# EAGLE board ImageProc_2.5 (EAGLE 6.0)
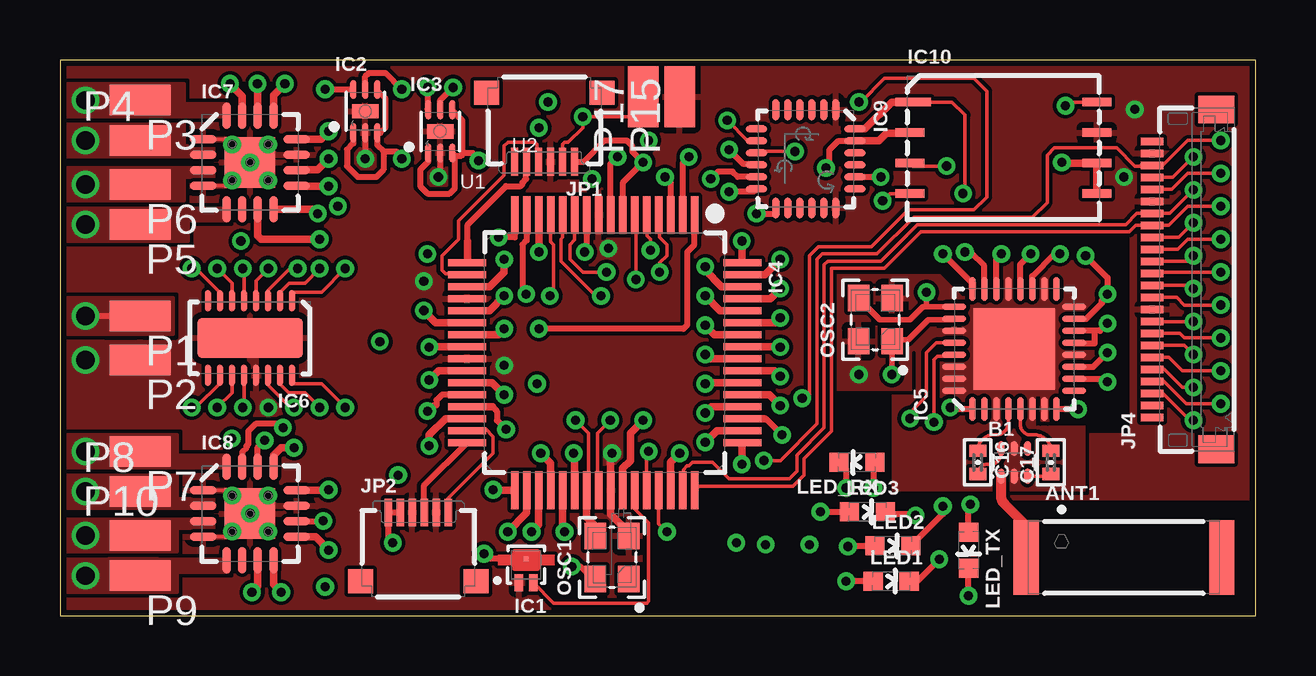
[diagram p0: board, top side]
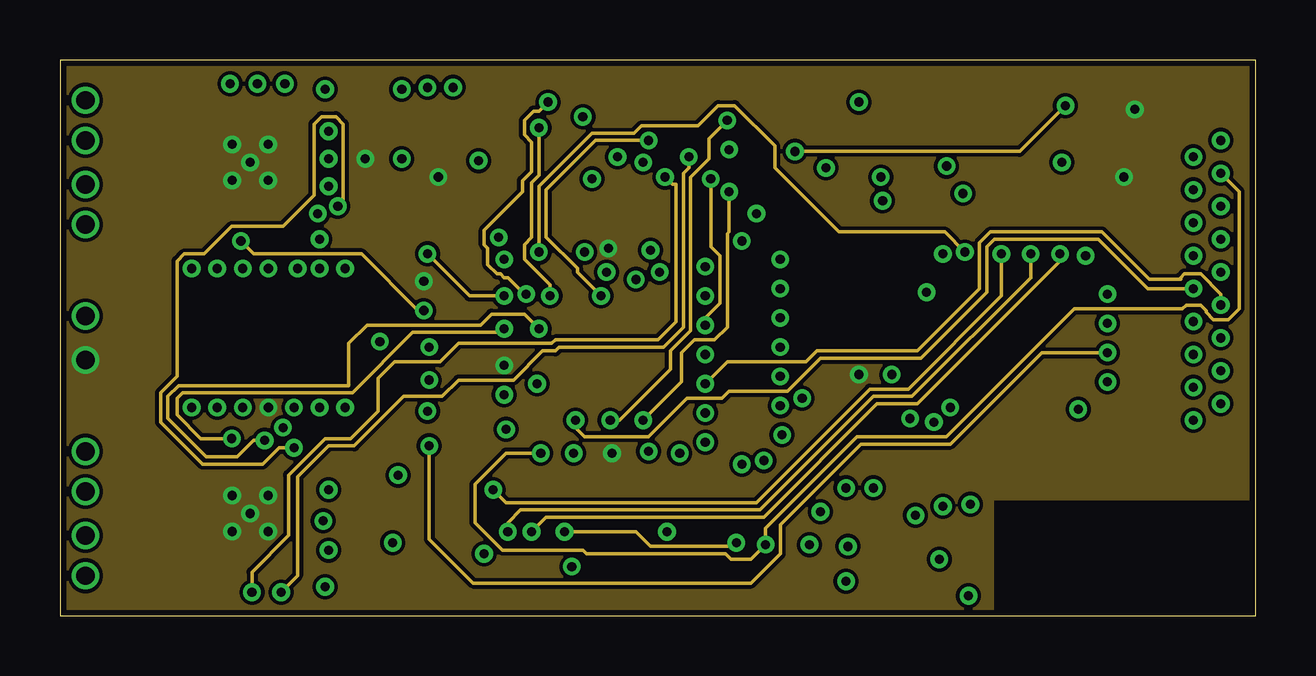
[diagram p1: board, inner layer Ground]
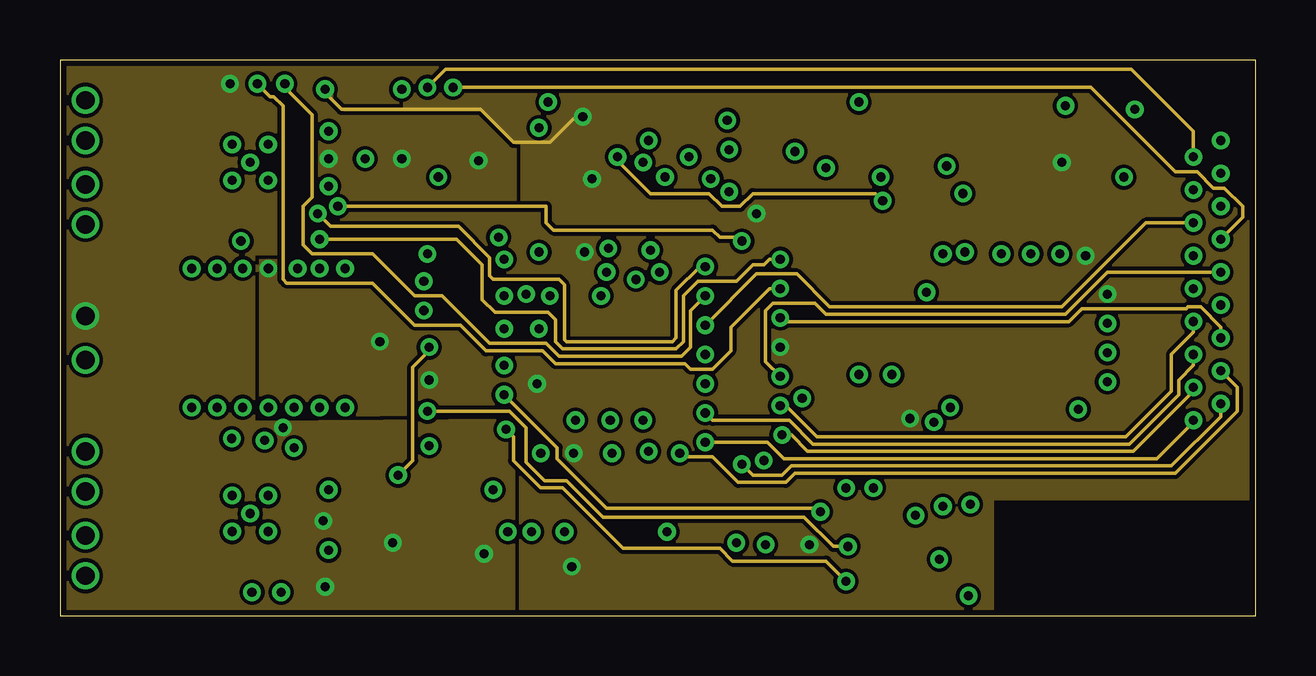
[diagram p2: board, inner layer Power]
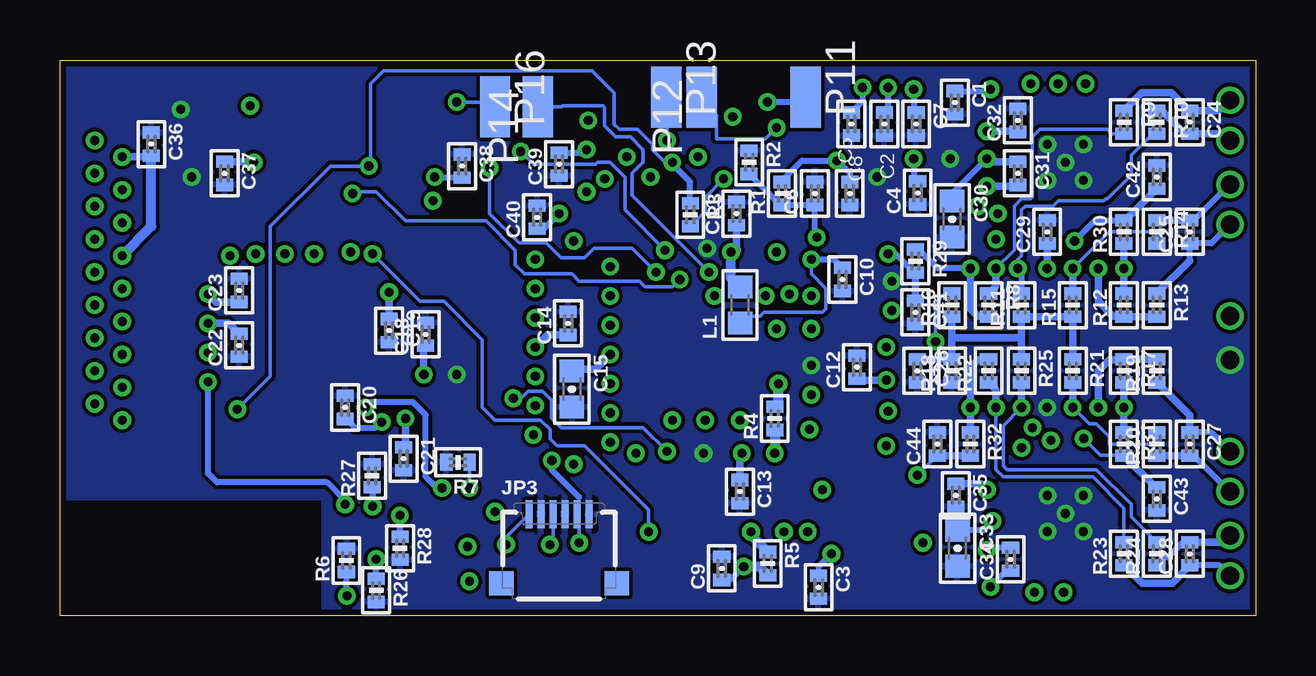
[diagram p3: board, bottom side, seen from below]

Size 49.83 x 23.16 mm. Coordinates in mm from the lower left corner, seen from the top.
Outline: 0,0 49.84,0 49.84,23.16 0,23.16 0,0
Copper layers (1*2+3*16): Top 0.035559375mm / dielectric 9mil / Ground 0.035559375mm / dielectric 40mil / Power 0.035559375mm / dielectric 9mil / Bottom 0.035559375mm
Design rules: minimum track width 6mil, minimum drill 15mil, track to track 6mil, track to pad 6mil, pad to pad 6mil, via to via 6mil, smd to smd 6mil, copper to edge 10mil, drill to drill 7mil, minimum pad ring 7mil, minimum via ring 7mil, stop-mask expansion 3mil, vias tented up to drill 0mil, thermal gap 10mil
tKeepout: 8 lines
bKeepout: 8 lines
tRestrict: 17 lines

## Footprints (pad centres in the part's own frame; a part is rotated, then mirrored left to right if it is on the bottom)
ANT8030-2R4-01A = smd 1.05 x 3.1: A -4.075,0; B 4.075,0
0603-BALUN = smd 0.3 x 0.65: 1 -0.55,-0.575; 2 0,-0.575; 3 0.55,-0.575; 4 -0.55,0.575; 5 0,0.575; 6 0.55,0.575
0402-CAP = smd 0.508 x 0.711: 1 -0.483,0; 2 0.483,0
0603-CAP = smd 0.94 x 1.016: 1 -0.749,0; 2 0.749,0
USP-3 = smd 0.35 x 0.7: 1 0.3,0.75; 2 -0.3,0.75 | smd 0.2 x 0.2: 3 0,-0.25
MLF-6 = smd 0.25 x 0.8: 1 -0.5,-0.9; 2 0,-0.9; 3 0.5,-0.9; 4 0.5,0.9; 5 0,0.9; 6 -0.5,0.9 | smd 1.1 x 0.6: EPAD 0,0
TQFP-64 = smd 1.575 x 0.3: 1 -5.737,3.75; 2 -5.737,3.25; 3 -5.737,2.75; 4 -5.737,2.25; 5 -5.737,1.75; 6 -5.737,1.25; 7 -5.737,0.75; 8 -5.737,0.25; 9 -5.737,-0.25; 10 -5.737,-0.75; 11 -5.737,-1.25; 12 -5.737,-1.75; 13 -5.737,-2.25; 14 -5.737,-2.75; 15 -5.737,-3.25; 16 -5.737,-3.75; 33 5.737,-3.75; 34 5.737,-3.25; 35 5.737,-2.75; 36 5.737,-2.25; 37 5.737,-1.75; 38 5.737,-1.25; 39 5.737,-0.75; 40 5.737,-0.25; 41 5.737,0.25; 42 5.737,0.75; 43 5.737,1.25; 44 5.737,1.75; 45 5.737,2.25; 46 5.737,2.75; 47 5.737,3.25; 48 5.737,3.75 | smd 0.3 x 1.575: 17 -3.75,-5.737; 18 -3.25,-5.737; 19 -2.75,-5.737; 20 -2.25,-5.737; 21 -1.75,-5.737; 22 -1.25,-5.737; 23 -0.75,-5.737; 24 -0.25,-5.737; 25 0.25,-5.737; 26 0.75,-5.737; 27 1.25,-5.737; 28 1.75,-5.737; 29 2.25,-5.737; 30 2.75,-5.737; 31 3.25,-5.737; 32 3.75,-5.737; 49 3.75,5.737; 50 3.25,5.737; 51 2.75,5.737; 52 2.25,5.737; 53 1.75,5.737; 54 1.25,5.737; 55 0.75,5.737; 56 0.25,5.737; 57 -0.25,5.737; 58 -0.75,5.737; 59 -1.25,5.737; 60 -1.75,5.737; 61 -2.25,5.737; 62 -2.75,5.737; 63 -3.25,5.737; 64 -3.75,5.737
VQFN-32QN2 = smd 1 x 0.28: 1 -2.5,1.75; 2 -2.5,1.25; 3 -2.5,0.75; 4 -2.5,0.25; 5 -2.5,-0.25; 6 -2.5,-0.75; 7 -2.5,-1.25; 8 -2.5,-1.75; 17 2.5,-1.75; 18 2.5,-1.25; 19 2.5,-0.75; 20 2.5,-0.25; 21 2.5,0.25; 22 2.5,0.75; 23 2.5,1.25; 24 2.5,1.75 | smd 0.28 x 1: 9 -1.75,-2.5; 10 -1.25,-2.5; 11 -0.75,-2.5; 12 -0.25,-2.5; 13 0.25,-2.5; 14 0.75,-2.5; 15 1.25,-2.5; 16 1.75,-2.5; 25 1.75,2.5; 26 1.25,2.5; 27 0.75,2.5; 28 0.25,2.5; 29 -0.25,2.5; 30 -0.75,2.5; 31 -1.25,2.5; 32 -1.75,2.5 | smd 3.4 x 3.4: PAD 0,0
DFN-16 = smd 0.25 x 0.9: 1 -1.75,-1.55; 2 -1.25,-1.55; 3 -0.75,-1.55; 4 -0.25,-1.55; 5 0.25,-1.55; 6 0.75,-1.55; 7 1.25,-1.55; 8 1.75,-1.55; 9 1.75,1.55; 10 1.25,1.55; 11 0.75,1.55; 12 0.25,1.55; 13 -0.25,1.55; 14 -0.75,1.55; 15 -1.25,1.55; 16 -1.75,1.55 | smd 4.4 x 1.65: PAD 0,0
S-PWQFN-N16 = smd 1.1 x 0.35: 1 -1.95,0.975; 2 -1.95,0.325; 3 -1.95,-0.325; 4 -1.95,-0.975; 9 1.95,-0.975; 10 1.95,-0.325; 11 1.95,0.325; 12 1.95,0.975 | smd 0.35 x 1.1: 5 -0.975,-1.95; 6 -0.325,-1.95; 7 0.325,-1.95; 8 0.975,-1.95; 13 0.975,1.95; 14 0.325,1.95; 15 -0.325,1.95; 16 -0.975,1.95 | smd 2.1 x 2.1: PPAD 0,0
QFN-24 = smd 0.9 x 0.3: 1 -2.05,1.25; 2 -2.05,0.75; 3 -2.05,0.25; 4 -2.05,-0.25; 5 -2.05,-0.75; 6 -2.05,-1.25; 13 2.05,-1.25; 14 2.05,-0.75; 15 2.05,-0.25; 16 2.05,0.25; 17 2.05,0.75; 18 2.05,1.25 | smd 0.3 x 0.9: 7 -1.25,-2.05; 8 -0.75,-2.05; 9 -0.25,-2.05; 10 0.25,-2.05; 11 0.75,-2.05; 12 1.25,-2.05; 19 1.25,2.05; 20 0.75,2.05; 21 0.25,2.05; 22 -0.25,2.05; 23 -0.75,2.05; 24 -1.25,2.05
CASON-8 = smd 1.473 x 0.369: 1 -3.764,1.905 | smd 1.203 x 0.369: 2 -3.898,0.635; 3 -3.898,-0.635; 4 -3.898,-1.905; 5 3.898,-1.905; 6 3.898,-0.635; 7 3.898,0.635; 8 3.898,1.905
MOLEX_503480-0600 = smd 0.3 x 1.15: 1 -1.25,1.725; 2 -0.75,1.725; 3 -0.25,1.725; 4 0.25,1.725; 5 0.75,1.725; 6 1.25,1.725 | smd 1.035 x 1: L -2.408,-1.15; R 2.408,-1.15
MOLEX_52740-2490 = smd 0.3 x 0.95: 1 -5.75,1.875; 2 -5.25,1.875; 3 -4.75,1.875; 4 -4.25,1.875; 5 -3.75,1.875; 6 -3.25,1.875; 7 -2.75,1.875; 8 -2.25,1.875; 9 -1.75,1.875; 10 -1.25,1.875; 11 -0.75,1.875; 12 -0.25,1.875; 13 0.25,1.875; 14 0.75,1.875; 15 1.25,1.875; 16 1.75,1.875; 17 2.25,1.875; 18 2.75,1.875; 19 3.25,1.875; 20 3.75,1.875; 21 4.25,1.875; 22 4.75,1.875; 23 5.25,1.875; 24 5.75,1.875 | smd 1.15 x 1.5: L -7.075,-0.8; R 7.075,-0.8
0603 = smd 0.94 x 1.016: 1 -0.749,0; 2 0.749,0
LED-0603 = smd 0.8 x 0.8: A 0,-0.75; C 0,0.75
OSCILLATOR-SMD = smd 1.1 x 0.9: 1 -0.9,-0.7; 2 0.9,-0.7; 3 0.9,0.7; 4 -0.9,0.7
CRYSTAL-SMD = smd 1.1 x 0.9: 1 -0.9,-0.7; 2 0.9,-0.7; 3 0.9,0.7; 4 -0.9,0.7
SMD1,27-2,54 = smd 1.27 x 2.54: 1 0,0
0402-RES = smd 0.508 x 0.711: 1 -0.483,0; 2 0.483,0

## Placement (x,y rotation side)
ANT1  ANT8030-2R4-01A  [ANT8030-2R4-01A]  44.35,2.44 0 top
B1  HHM1710D1  [0603-BALUN]  39.78,6.4 0 top
C1  1uF  [0402-CAP]  12.53,21.39 270 bottom
C2  1uF  [0402-CAP]  15.47,20.5 270 bottom
C3  0.1uF  [0402-CAP]  18.21,1.19 270 bottom
C4  1uF  [0402-CAP]  14.08,17.63 90 bottom
C5  1uF  [0402-CAP]  16.92,17.6 90 bottom
C6  0.1uF  [0402-CAP]  18.36,17.6 90 bottom
C7  1uF  [0402-CAP]  14.15,20.5 270 bottom
C8  1uF  [0402-CAP]  16.84,20.5 270 bottom
C9  0.1uF  [0402-CAP]  22.25,1.98 90 bottom
C10  0.1uF  [0402-CAP]  17.22,14.02 270 bottom
C11  0.1uF  [0402-CAP]  21.64,16.76 90 bottom
C12  0.1uF  [0402-CAP]  16.61,10.36 90 bottom
C13  0.1uF  [0402-CAP]  21.49,5.18 270 bottom
C14  0.1uF  [0402-CAP]  28.65,12.19 90 bottom
C15  4.7uF  [0603-CAP]  28.5,9.45 270 bottom
C16  22pF  [0402-CAP]  38.25,6.4 270 top
C17  22pF  [0402-CAP]  41.3,6.4 90 top
C18  10pF  [0402-CAP]  34.59,11.73 90 bottom
C19  10pF  [0402-CAP]  36.12,11.89 270 bottom
C20  0.1uF  [0402-CAP]  37.95,8.69 270 bottom
C21  1uF  [0402-CAP]  35.51,6.55 270 bottom
C22  0.1uF  [0402-CAP]  42.37,11.28 90 bottom
C23  1uF  [0402-CAP]  42.37,13.56 90 bottom
C24  0.1uF  [0402-CAP]  2.74,20.57 270 bottom
C25  0.1uF  [0402-CAP]  2.74,16 90 bottom
C26  0.1uF  [0402-CAP]  14.1,10.21 270 bottom
C27  0.1uF  [0402-CAP]  2.74,7.16 270 bottom
C28  0.1uF  [0402-CAP]  2.74,2.59 90 bottom
C29  0.1uF  [0402-CAP]  8.69,16 90 bottom
C30  22uF  [0603-CAP]  12.65,16.54 270 bottom
C31  10nF  [0402-CAP]  9.91,18.44 270 bottom
C32  2.2uF  [0402-CAP]  9.91,20.65 90 bottom
C33  22uF  [0603-CAP]  12.42,2.82 270 bottom
C34  10nF  [0402-CAP]  10.21,2.36 90 bottom
C35  2.2uF  [0402-CAP]  12.5,5.03 270 bottom
C36  0.1uF  [0402-CAP]  46.02,19.66 270 bottom
C37  0.1uF  [0402-CAP]  42.98,18.44 270 bottom
C38  2.2nF  [0402-CAP]  33.07,18.75 270 bottom
C39  0.1uF  [0402-CAP]  29.03,18.82 90 bottom
C40  0.1uF  [0402-CAP]  29.95,16.61 90 bottom
C41  2.2nF  [0402-CAP]  14.17,12.65 270 bottom
C42  2.2nF  [0402-CAP]  4.11,18.29 90 bottom
C43  2.2nF  [0402-CAP]  4.11,4.88 270 bottom
C44  2.2nF  [0402-CAP]  13.26,7.16 90 bottom
IC1  XC61GC3002HR-G  [USP-3]  19.43,2.13 180 top
IC2  MIC5335-SPYMT  [MLF-6]  12.73,21.03 0 top
IC3  MIC5335-JGYMT  [MLF-6]  15.85,20.19 0 top
IC4  DSPIC33FJ128MC706A  [TQFP-64]  22.71,10.97 270 top
IC5  AT86RF233-ZU  [VQFN-32QN2]  39.78,11.13 90 top
IC6  LTC6088  [DFN-16]  7.92,11.58 180 top
IC7  DRV8833RTY  [S-PWQFN-N16]  7.92,18.9 0 top
IC8  DRV8833RTY  [S-PWQFN-N16]  7.92,4.27 0 top
IC9  MPU-6000  [QFN-24]  31.09,19.05 270 top
IC10  AT45DB642D-CNU  [CASON-8]  39.32,19.51 0 top
JP1  MOLEX_503480-0600  [MOLEX_503480-0600]  20.19,20.65 180 top
JP2  MOLEX_503480-0600  [MOLEX_503480-0600]  14.94,2.59 0 top
JP3  MOLEX_503480-0600  [MOLEX_503480-0600]  29.03,2.51 0 bottom
JP4  51441-2493-C  [MOLEX_52740-2490]  47.4,14.02 90 top
L1  4.7uH  [0603]  21.49,12.95 90 bottom
LED1  YELLOW  [LED-0603]  34.65,1.45 270 top
LED2  GREEN  [LED-0603]  34.72,2.92 270 top
LED3  RED  [LED-0603]  33.66,4.34 270 top
LED_RX  GREEN  [LED-0603]  33.22,6.4 90 top
LED_TX  RED  [LED-0603]  37.87,2.74 180 top
OSC1  ECS-2033-400  [OSCILLATOR-SMD]  23.01,2.44 90 top
OSC2  NX2520SA-16.000000MHZ  [CRYSTAL-SMD]  33.99,12.34 90 top
P1  BAT+  [SMD1,27-2,54]  3.35,12.5 90 top
P2  BAT-  [SMD1,27-2,54]  3.35,10.67 90 top
P3  MA1  [SMD1,27-2,54]  3.35,21.49 90 top
P4  MA2  [SMD1,27-2,54]  3.35,19.81 270 top
P5  MB1  [SMD1,27-2,54]  3.35,16.31 90 top
P6  MB2  [SMD1,27-2,54]  3.35,17.98 90 top
P7  MC1  [SMD1,27-2,54]  3.35,6.86 90 top
P8  MC2  [SMD1,27-2,54]  3.35,5.18 270 top
P9  MD1  [SMD1,27-2,54]  3.35,1.68 90 top
P10  MD2  [SMD1,27-2,54]  3.35,3.35 270 top
P11  EXT1  [SMD1,27-2,54]  18.75,21.62 180 bottom
P12  EXT2  [SMD1,27-2,54]  23.09,21.62 0 bottom
P13  EXT3  [SMD1,27-2,54]  24.56,21.62 180 bottom
P14  EXT4  [SMD1,27-2,54]  29.92,21.21 0 bottom
P15  EXT5  [SMD1,27-2,54]  25.83,21.64 0 top
P16  EXT5  [SMD1,27-2,54]  31.7,21.21 180 bottom
P17  EXT5  [SMD1,27-2,54]  24.31,21.64 0 top
R1  1k  [0402-RES]  19.74,17.6 90 bottom
R2  2.7k  [0402-RES]  21.11,18.9 270 bottom
R3  4.7k  [0402-RES]  23.56,16.72 270 bottom
R4  4.7k  [0402-RES]  20.04,8.23 90 bottom
R5  4.7k  [0402-RES]  20.33,2.18 270 bottom
R6  2.7k  [0402-RES]  37.9,2.31 90 bottom
R7  2.7k  [0402-RES]  33.25,6.4 180 bottom
R8  15k  [0402-RES]  11.13,12.95 270 bottom
R9  47k  [0402-RES]  5.49,20.57 270 bottom
R10  47k  [0402-RES]  4.11,20.57 270 bottom
R11  15k  [0402-RES]  9.75,12.95 90 bottom
R12  15k  [0402-RES]  5.49,12.95 90 bottom
R13  47k  [0402-RES]  4.11,12.95 270 bottom
R14  47k  [0402-RES]  4.11,16 270 bottom
R15  15k  [0402-RES]  7.62,12.95 90 bottom
R16  4.7k  [0402-RES]  12.65,12.95 90 bottom
R17  15k  [0402-RES]  5.49,10.21 270 bottom
R18  4.7k  [0402-RES]  12.65,10.21 90 bottom
R19  47k  [0402-RES]  4.11,10.21 90 bottom
R20  47k  [0402-RES]  4.11,7.16 90 bottom
R21  15k  [0402-RES]  7.62,10.21 270 bottom
R22  15k  [0402-RES]  11.13,10.21 90 bottom
R23  47k  [0402-RES]  5.49,2.59 90 bottom
R24  47k  [0402-RES]  4.11,2.59 90 bottom
R25  15k  [0402-RES]  9.75,10.21 270 bottom
R26  2.7k  [0402-RES]  36.65,1.07 270 bottom
R27  2.7k  [0402-RES]  36.83,5.84 90 bottom
R28  2.7k  [0402-RES]  35.66,2.82 270 bottom
R29  1k  [0402-RES]  14.17,14.78 270 bottom
R30  1k  [0402-RES]  5.49,16 90 bottom
R31  1k  [0402-RES]  5.49,7.16 270 bottom
R32  1k  [0402-RES]  11.89,7.16 270 bottom

## Library data of the parts
ANT1 B1 C1-C10 C26 C29 C36 C41 IC1-IC10 JP1-JP4 L1 LED1-LED3 LED_RX LED_TX OSC1 OSC2 R1-R3 R6 R7 R26-R29 = biomimetic
C11-C14 C30 C33 C40 C42-C44 R4 R5 R30-R32 = biomimetic; AUTHOR: Ryan Julian (ryanjulian@berkeley.edu); REVISION: 1; YEAR: 2012
C15 = biomimetic; COMMENT: ESR < 5 Ohm; TECHNOLOGY: CERAMIC; VOLTAGE: 16V
C16 C17 = biomimetic; DIELECTRIC: C0G; TECHNOLOGY: CERAMIC; TOLERANCE: 5%; VOLTAGE: 50V
C18 C19 = biomimetic; AUTHOR: Ryan Julian (ryanjulian@berkeley.edu); DIELECTRIC: C0G; REVISION: 1; TECHNOLOGY: CERAMIC; TOLERANCE: 10%; VOLTAGE: 50V; YEAR: 2012
C20 C22 = biomimetic; AUTHOR: Ryan Julian (ryanjulian@berkeley.edu); DIELECTRIC: X7R; REVISION: 1; TECHNOLOGY: CERAMIC; TOLERANCE: 10%; VOLTAGE: 16V; YEAR: 2012
C21 C23 = biomimetic; AUTHOR: Ryan Julian (ryanjulian@berkeley.edu); DIELECTRIC: X5R; REVISION: 1; TECHNOLOGY: CERAMIC; TOLERANCE: 10%; VOLTAGE: 16V; YEAR: 2012
C24 C25 C27 C28 = biomimetic; AUTHOR: Ryan Julian (ryanjulian@berkeley.edu); REVISION: 1; TECHNOLOGY: CERAMIC; VOLTAGE: 10V; YEAR: 2012
C31 C34 = biomimetic; AUTHOR: Ryan Julian (ryanjulian@berkeley.edu); DIELECTRIC: X7R; REVISION: 1; TECHNOLOGY: CERAMIC; VOLTAGE: 16V; YEAR: 2012
C32 = biomimetic; AUTHOR: Ryan Julian (ryanjulian@berkeley.edu); REVISION: 1; TECHNOLOGY: CERAMIC; VOLTAGE: 6.3V; YEAR: 2012
C35 = biomimetic; TECHNOLOGY: CERAMIC; VOLTAGE: 6.3V
C37 = biomimetic; DIELECTRIC: X7R; TECHNOLOGY: CERAMIC; TOLERANCE: 10%; VOLTAGE: 4V
C38 = biomimetic; DIELECTRIC: X7R; TECHNOLOGY: CERAMIC; TOLERANCE: 10%; VOLTAGE: 50V
C39 = biomimetic; DIELECTRIC: X7R; TECHNOLOGY: CERAMIC; TOLERANCE: 10%; VOLTAGE: 2V
P1 P2 P4-P17 = wirepad; AUTHOR: Ryan Julian (ryanjulian@berkeley.edu); REVISION: 1; YEAR: 2012
P3 = wirepad
R8 = biomimetic; AUTHOR: Ryan Julian (ryanjulian@berkeley.edu); REVISION: 1; TOLERANCE: 1%; YEAR: 2012
R9-R25 = biomimetic; TOLERANCE: 1%

## Nets
1.8V: C8.1 IC3.5 JP4.15
2.5V: C2.1 C36.2 IC3.6 JP4.14 JP4.21
3.0V: C7.1 IC2.5
3.3V: C1.1 C9.1 C11.1 C12.1 C13.1 C14.1 C21.1 C23.1 C29.1 C37.1 C40.1 IC2.6 IC4.10 IC4.26 IC4.38 IC4.57 IC5.15 IC5.28 IC6.4 IC9.13 IC10.5 IC10.6 JP1.2 JP3.1 L1.2 OSC1.4 P17.1 R3.2 R4.2 R5.2 R16.2
40MHZ: IC4.39 JP4.12 OSC1.3
!RESET: IC4.7 IC5.8 IC10.3 JP1.1 R3.1
!SS1: IC4.14 IC5.23
!SS2_1: IC4.8 IC10.4
!SS2_2: IC4.40 IC9.8
AN1/RB1: IC4.15 P11.1
AN3/INDX/RB3: IC4.13 P12.1
AN4/QEA/IC7/RB4: IC4.12 P13.1
AN5/QEB/IC8/RB5: IC4.11 P14.1
BATT_LEVEL: C6.1 IC4.16 R1.1 R2.2
CAM_D0: IC4.46 JP4.6
CAM_D1: IC4.49 JP4.4
CAM_D2: IC4.50 JP4.3
CAM_D3: IC4.51 JP4.5
CAM_D4: IC4.52 JP4.7
CAM_D5: IC4.53 JP4.9
CAM_D6: IC4.54 JP4.11
CAM_D7: IC4.55 JP4.13
CAM_HREF: IC4.58 IC9.11 JP4.16
CAM_PCLK: IC4.59 JP4.8
CAM_PWDN: IC4.48 JP4.17
CAM_VSYNC: IC4.47 JP4.18
GN_LED: IC4.28 LED2.A
GND: B1.2 B1.5 C1.2 C2.2 C3.2 C4.1 C5.1 C6.2 C7.2 C8.2 C9.2 C10.2 C11.2 C12.2 C13.2 C14.2 C15.2 C18.2 C19.2 C20.1 C21.2 C22.1 C23.2 C26.2 C29.2 C30.2 C32.2 C33.2 C35.2 C36.1 C37.2 C38.1 C39.1 C40.2 C41.2 C42.2 C43.2 C44.2 IC1.1 IC2.2 IC2.EPAD IC3.2 IC3.EPAD IC4.9 IC4.20 IC4.25 IC4.41 IC5.3 IC5.6 IC5.7 IC5.12 IC5.16 IC5.18 IC5.21 IC5.27 IC5.30 IC5.31 IC5.32 IC5.PAD IC6.13 IC6.PAD IC7.1 IC7.4 IC7.11 IC7.PPAD IC8.1 IC8.4 IC8.11 IC8.PPAD IC9.1 IC9.18 IC10.7 JP1.3 JP2.3 JP2.5 JP3.2 JP3.4 JP3.6 JP4.10 JP4.19 JP4.23 OSC1.2 OSC2.2 OSC2.4 P2.1 P15.1 R2.1 R6.2 R7.2 R18.1 R26.2 R27.2 R28.2
IC3/INT3/RD10: IC4.44 P16.1
IMU_IRQ: IC4.42 IC9.12
LOWBATT_IRQ: IC1.2 IC4.43
MOTOR_A_BEMF: C41.1 IC4.21 R29.2
MOTOR_A_IN1: IC4.61 IC7.14
MOTOR_A_IN2: IC4.60 IC7.13
MOTOR_A_OUT1: C24.1 IC7.16 P3.1 R9.1
MOTOR_A_OUT2: C24.2 IC7.2 P4.1 R10.1
MOTOR_B_BEMF: C42.1 IC4.22 R30.2
MOTOR_B_IN1: IC4.63 IC7.7
MOTOR_B_IN2: IC4.62 IC7.8
MOTOR_B_OUT1: C25.1 IC7.5 P5.1 R13.1
MOTOR_B_OUT2: C25.2 IC7.3 P6.1 R14.1
MOTOR_C_BEMF: C43.1 IC4.23 R31.2
MOTOR_C_IN1: IC4.1 IC8.14
MOTOR_C_IN2: IC4.64 IC8.13
MOTOR_C_OUT1: C27.1 IC8.16 P7.1 R19.1
MOTOR_C_OUT2: C27.2 IC8.2 P8.1 R20.1
MOTOR_D_BEMF: C44.1 IC4.24 R32.2
MOTOR_D_IN1: IC4.3 IC8.7
MOTOR_D_IN2: IC4.2 IC8.8
MOTOR_D_OUT1: C28.1 IC8.5 P9.1 R23.1
MOTOR_D_OUT2: C28.2 IC8.3 P10.1 R24.1
N$1: C22.2 IC5.13 IC5.14
N$2: C31.2 IC7.9
N$3: C20.2 IC5.29
N$4: ANT1.A B1.1
N$5: LED_TX.C R6.1
N$6: C16.1 IC5.4
N$7: C17.2 IC5.5
N$8: C19.1 IC5.25 OSC2.3
N$9: C18.1 IC5.26 OSC2.1
N$10: B1.3 C17.1
N$11: LED_RX.C R7.1
N$12: B1.4 C16.2
N$13: IC5.1 LED_RX.A
N$14: IC5.10 LED_TX.A
N$15: LED1.C R26.1
N$16: LED2.C R27.1
N$17: LED3.C R28.1
N$18: C32.1 IC7.12
N$19: C34.2 IC8.9
N$20: C35.1 IC8.12
N$21: C10.1 IC4.19 L1.1
N$22: IC6.6 R12.1 R13.2
N$23: IC6.5 R14.2 R15.2
N$24: IC6.11 R17.1 R19.2
N$25: IC6.12 R20.2 R21.2
N$26: IC6.15 R22.1 R23.2
N$27: IC6.14 R24.2 R25.2
N$28: C15.1 IC4.56
N$29: C38.2 IC9.20
N$30: IC6.2 R8.1 R9.2
N$31: IC6.3 R10.2 R11.2
N$32: C39.2 IC9.10
N$34: IC6.16 R22.2 R32.1
N$35: IC6.10 R17.2 R31.1
N$36: IC6.1 R8.2 R29.1
N$37: IC6.7 R12.2 R30.1
PGC: IC4.17 JP1.5
PGD: IC4.18 JP1.4
RADIO_IRQ: IC4.45 IC5.24
RADIO_SLP_TR: IC4.30 IC5.11
RD_LED: IC4.27 LED3.A
SCK1: IC4.35 IC5.19
SCK2: IC4.4 IC9.23 IC10.2
SCL1: IC4.36 JP3.3 JP4.20 R4.1
SDA1: IC4.37 JP3.5 JP4.22 R5.1
SDI1: IC4.34 IC5.20
SDI2: IC4.5 IC9.9 IC10.8
SDO1: IC4.33 IC5.22
SDO2: IC4.6 IC9.24 IC10.1
U2RX: IC4.31 JP2.6
U2TX: IC4.32 JP2.4
V_BATT: C3.1 C4.2 C5.2 C30.1 C31.1 C33.1 C34.1 IC1.3 IC2.1 IC2.3 IC2.4 IC3.1 IC3.3 IC3.4 IC7.10 IC7.15 IC8.10 IC8.15 JP2.1 JP2.2 P1.1 R1.2
V_REF: C26.1 R11.1 R15.1 R16.1 R18.2 R21.1 R25.1
YW_LED: IC4.29 LED1.A

## Tracks (layer width: path | path; a pad name or v marks a point on that pad's centre or on a via)
1.8V  (via drill 0.38)
  Top 0.152: JP4.15 46.59,15.27 47.02,15.7 v48.39,15.7
  Top 0.254: IC3.5 15.85,21.49 v16.38,22.02
  Power 0.152: v16.38,22.02 42.98,22.02 46.48,18.52 47.4,18.52 48.08,17.83 48.54,17.83 49.3,17.07 49.3,16.61 v48.39,15.7
  Bottom 0.254: v16.38,22.02 16.38,21.44 C8.1
2.5V  (via drill 0.38)
  Top 0.152: JP4.21 46.39,18.27 v47.24,19.13 | JP4.14 47,14.77 v47.24,15.01
  Top 0.254: v15.32,22.02 15.32,21.13 IC3.6
  Power 0.152: v15.32,22.02 16.08,22.78 44.65,22.78 47.24,20.19 v47.24,19.13
  Bottom 0.254: v15.32,22.02 15.32,21.13 C2.1
  Bottom 0.305: C36.2 46.08,19.13 v47.24,19.13
  Bottom 0.406: v47.24,15.01 46.02,16.23 C36.2
3.0V  (via drill 0.38)
  Top 0.254: IC2.5 12.72,22.48 12.88,22.63 13.56,22.63 v14.25,21.95
  Bottom 0.254: v14.25,21.95 14.25,21.08 C7.1
3.3V  (via drill 0.38)
  Top 0.152: IC6.4 8.18,13.97 v8.69,14.48 | IC5.28 36.52,11.38 36.12,10.97 36.12,9.14 35.43,8.46 v35.43,8.23 | P17.1 24.31,21.49 24.23,21.49 24.23,20.8 v21.79,20.8 21.79,20.34 21.18,19.74 21.03,19.74 20.95,19.66 20.95,18.94 JP1.2
  Top 0.254: IC2.6 11.06,21.93 v11.05,21.95 | v29.03,16.76 29.84,16.76 IC9.13 | v21.34,2.06 21.69,2.06 C9.1 22.29,1.54 OSC1.4 | IC5.15 42.78,12.38 43.43,13.03 43.43,13.18 v43.66,13.41 43.66,14.1 v42.75,15.01 | IC4.10 21.96,15.33 21.87,15.24 v21.87,15.16
  Top 0.305: IC10.5 IC10.6 41.78,18.87 v41.76,18.9 | OSC1.4 22.3,1.52 | v15.39,9.83 15.79,10.22 IC4.26 | IC4.38 21.46,6.74 v21.41,6.78 | IC4.57 30,11.22 v30.02,11.2
  Power 0.152: v11.05,21.95 11.05,21.79 11.73,21.11 17.53,21.11 18.9,19.74 20.42,19.74 21.49,20.8 v21.79,20.8
  Bottom 0.152: v22.17,18.21 22.94,17.45 22.94,16.86 R3.2 | JP3.1 31.24,3.28 v31.24,2.97 | v13.34,11.43 13.34,13.03 12.93,13.44 R16.2
  Bottom 0.254: C1.1 11.12,21.87 v11.05,21.95 | C40.1 29.67,16.13 v29.03,16.76 | 22.23,1.52 21.87,1.52 v21.34,2.06
  Bottom 0.305: C37.1 41.78,18.92 v41.76,18.9 | C29.1 v8.69,14.48 | C9.1 22.23,1.52 | 21.64,15.24 C11.1 | C13.1 21.49,6.71 v21.41,6.78 | v15.39,9.83 16.56,9.83 C12.1 | C21.1 35.43,7.11 v35.43,8.23 | C14.1 29.52,11.71 v30.02,11.2 | C23.1 43.33,13.08 v43.66,13.41
  Bottom 0.406: R5.2 20.69,2.06 v21.34,2.06 | R4.2 19.89,8.87 v19.89,9.68 | L1.2 21.87,14.08 v21.87,15.16 21.72,15.16 21.64,15.24
  pour Power (rank 6): 0,23.16 53.8,23.16 53.8,4.88 38.86,4.88 38.86,0 0,0
40MHZ  (via drill 0.38)
  Top 0.152: JP4.12 47.11,13.77 v47.24,13.64 | v21.49,8.15 22.02,7.62 22.02,5.71 21.96,5.65 IC4.39
  Top 0.305: IC4.39 21.96,4.1 22.25,3.81 22.25,3.4 OSC1.3
  Ground 0.152: v47.24,13.64 45.34,13.64 43.28,15.7 38.94,15.7 38.63,15.39 38.63,13.49 35.89,10.74 31.7,10.74 30.33,9.37 27.89,9.37 27.58,9.07 26.14,9.07 24.54,7.47 21.87,7.47 21.49,7.85 v21.49,8.15
!RESET  (via drill 0.38)
  Top 0.152: v36.96,18.75 35.55,18.75 IC10.3
  Top 0.254: 23.47,16.72 IC4.7 23.46,18.05 v24.31,18.9 23.85,19.36 23.85,19.58 23.62,19.81 22.71,19.81 21.82,18.93 JP1.1 | IC5.8 42.43,8.62 v42.44,8.61
  Bottom 0.152: v42.44,8.61 41.07,9.98 41.07,16.23 38.56,18.75 v36.96,18.75 36.88,18.82 36.88,22.17 36.35,22.71 27.66,22.71 26.75,21.79 26.75,20.5 26.52,20.27 25.76,20.27 25.15,19.66 25.15,19.43 24.61,18.9 v24.31,18.9 24.31,18.82
  Bottom 0.254: 24.31,18.82 23.57,18.08 R3.1
!SS1  (via drill 0.38)
  Top 0.254: IC5.23 38.53,14.59 37.95,15.16 v37.72,15.16
  Top 0.305: IC4.14 v19.96,15.16
  Ground 0.152: v19.96,15.16 19.96,17.91 22.17,20.12 23.93,20.12 24.23,20.42 26.59,20.42 27.43,21.26 28.12,21.26 29.79,19.58 29.79,18.67 32.46,16 36.88,16 v37.72,15.16
!SS2_1  (via drill 0.38)
  Top 0.152: v34.29,17.3 34.59,17.6 IC10.4
  Top 0.254: v23.24,19.13 22.94,18.82 22.94,16.69 | IC4.8 22.94,16.69 | 22.94,16.69
  Power 0.152: v34.29,17.3 33.98,17.6 28.88,17.6 28.35,17.07 27.58,17.07 27.05,17.6 24.61,17.6 23.24,18.97 v23.24,19.13
!SS2_2  (via drill 0.38)
  Top 0.152: IC4.40 22.4,5.29 22.4,7.62 v22.94,8.15 | IC9.8 28.66,19.8 v27.81,20.65
  Ground 0.152: v22.94,8.15 23.32,8.15 25.45,10.29 25.45,11.05 26.29,11.89 26.29,18.29 27.05,19.05 27.05,19.89 v27.81,20.65
AN1/RB1  (via drill 0.38)
  Top 0.254: IC4.15 19.46,15.65 19.28,15.47 19.28,13.49 19.36,13.49 v19.43,13.41
  Ground 0.152: v19.43,13.41 19.36,13.41 18.67,14.1 18.52,14.1 18.36,14.25 18.21,14.25 17.83,14.63 17.83,15.32 17.68,15.47 17.68,16.08 19.28,17.68 19.28,18.14 19.66,18.52 19.66,19.74 19.36,20.04 19.36,20.65 19.74,21.03 19.96,21.03 v20.34,21.41
  Bottom 0.254: P11.1 18.95,21.41 v20.34,21.41
AN3/INDX/RB3  (via drill 0.38)
  Top 0.152: IC4.13 20.46,15.59 20.57,15.47 20.57,13.49 v20.42,13.34
  Ground 0.152: v20.42,13.34 20.42,13.79 19.36,14.86 19.36,15.47 19.66,15.77 19.66,18.06 19.96,18.36 v19.96,20.34
  Bottom 0.152: v19.96,20.34 20.42,19.89 22.48,19.89 22.48,20.85 23.09,21.46 P12.1
AN4/QEA/IC7/RB4  (via drill 0.38)
  Top 0.152: v22.55,13.34 22.33,13.34 20.88,14.78 20.88,15.7 20.96,15.78 IC4.12
  Ground 0.152: v24.54,19.81 22.33,19.81 20.27,17.75 20.27,15.77 21.57,14.48 21.57,14.33 v22.55,13.34
  Bottom 0.152: v24.54,19.81 24.54,21.59 P13.1
AN5/QEB/IC8/RB5  (via drill 0.38)
  Top 0.152: IC4.11 21.46,15.67 21.26,15.47 21.26,14.86 21.79,14.33 v22.78,14.33
  Bottom 0.152: P14.1 28.93,21.21 28.88,21.26 27.2,21.26 27.13,21.18 27.13,20.42 26.67,19.96 26.06,19.96 25.53,19.43 25.53,18.9 25.98,18.44 25.98,17.53 v22.78,14.33
BATT_LEVEL  (via drill 0.38)
  Top 0.254: IC4.16 18.96,15.77 v18.29,15.77
  Bottom 0.254: v18.29,15.77 18.36,15.85 C6.1 R1.1 19.81,17.12 R2.2
CAM_D0  (via drill 0.38)
  Top 0.152: JP4.6 46.23,10.77 46.79,10.21 v48.39,10.21
  Top 0.305: IC4.46 25.46,6.41 v25.83,6.78
  Power 0.152: v25.83,6.78 25.98,6.63 27.2,6.63 28.27,5.56 30.25,5.56 30.63,5.94 46.48,5.94 49.07,8.53 49.07,9.53 v48.39,10.21
CAM_D1  (via drill 0.38)
  Top 0.152: v48.39,8.84 46.94,8.84 46.01,9.77 JP4.4
  Top 0.305: IC4.49 28.42,7.2 v28.42,6.33
  Power 0.152: v48.39,8.84 48.39,8.31 46.33,6.25 30.48,6.25 30.1,5.87 28.88,5.87 v28.42,6.33
CAM_D2  (via drill 0.38)
  Top 0.152: JP4.3 45.97,9.27 47.09,8.15 v47.24,8.15
  Top 0.305: IC4.50 27.38,7.72 v26.9,7.24
  Power 0.152: v26.9,7.24 29.49,7.24 30.18,6.55 45.72,6.55 47.24,8.08 v47.24,8.15
CAM_D3  (via drill 0.38)
  Top 0.152: JP4.5 46.04,10.27 46.79,9.53 v47.24,9.53
  Top 0.254: 29.34,8.22 29.42,8.22 v30.1,7.54
  Top 0.305: IC4.51 29.34,8.22
  Power 0.152: v47.24,9.53 47.24,9.37 44.73,6.86 31.17,6.86 30.48,7.54 v30.1,7.54
CAM_D4  (via drill 0.38)
  Top 0.152: JP4.7 46.87,11.27 v47.24,10.9
  Top 0.305: IC4.52 27.16,8.72 v26.9,8.46
  Power 0.152: v47.24,10.9 47.24,10.44 46.63,9.83 46.63,9.22 44.58,7.16 31.39,7.16 30.4,8.15 27.2,8.15 v26.9,8.46
CAM_D5  (via drill 0.38)
  Top 0.152: JP4.9 v47.24,12.27
  Top 0.305: IC4.53 29.56,9.22 v30.02,8.76
  Power 0.152: v47.24,12.27 47.24,11.81 46.33,10.9 46.33,9.37 44.42,7.47 31.55,7.47 30.25,8.76 v30.02,8.76
CAM_D6  (via drill 0.38)
  Top 0.152: JP4.11 46.55,13.27 46.86,12.95 v48.39,12.95
  Top 0.305: IC4.54 26.94,9.72 v26.9,9.68
  Ground 0.152: v26.9,9.68 27.81,10.59 31.09,10.59 31.55,11.05 35.74,11.05 38.33,13.64 38.33,15.54 38.79,16 43.43,16 45.41,14.02 46.71,14.02 46.71,14.1 46.86,14.25 47.55,14.25 48.39,13.41 v48.39,12.95
CAM_D7  (via drill 0.38)
  Top 0.152: JP4.13 45.58,14.33 v48.39,14.33
  Top 0.305: IC4.55 29.78,10.22 v30.02,9.98
  Power 0.152: v48.39,14.33 43.66,14.33 41.91,12.57 31.93,12.57 31.47,13.03 29.72,13.03 29.41,12.72 29.41,10.59 v30.02,9.98
CAM_HREF  (via drill 0.38)
  Top 0.152: JP4.16 46.63,15.77 v47.24,16.38
  Top 0.254: IC9.11 28.26,18.3 28.04,18.52 27.43,18.52 v27.13,18.21
  Top 0.305: IC4.58 27.29,11.72 v26.9,12.12
  Ground 0.152: v26.9,12.12 26.9,12.42 27.51,13.03 27.51,15.01 27.13,15.39 v27.13,18.21
  Power 0.152: v47.24,16.38 45.26,16.38 41.76,12.88 32.08,12.88 30.71,14.25 29.03,14.25 v26.9,12.12
CAM_PCLK  (via drill 0.38)
  Top 0.152: JP4.8 46.67,11.77 46.86,11.58 v48.39,11.58
  Top 0.305: IC4.59 29.82,12.22 v30.02,12.42
  Power 0.152: v30.02,12.42 30.18,12.27 42.06,12.27 42.6,12.8 46.94,12.8 47.02,12.88 47.55,12.88 48.39,12.04 v48.39,11.58
CAM_PWDN  (via drill 0.38)
  Top 0.152: v48.39,17.07 47.02,17.07 46.22,16.27 JP4.17 44.85,16.27 44.58,16 35.89,16 34.37,14.48 32.16,14.48 32.16,7.7 31.01,6.55 31.01,5.87 30.56,5.41 26.63,5.41 IC4.48
CAM_VSYNC  (via drill 0.38)
  Top 0.152: v47.24,17.75 46.26,16.77 JP4.18 44.89,16.77 44.42,16.31 35.74,16.31 34.21,14.78 32,14.78 31.85,14.63 31.85,7.85 30.71,6.71 30.71,6.02 30.4,5.71 27.89,5.71 27.2,6.4 26.36,6.4 26.21,6.25 26.14,6.25 25.98,6.1 25.98,5.26 IC4.47
GN_LED  (via drill 0.38)
  Top 0.254: v32.84,2.9 33.95,2.9 LED2.A | IC4.28 15.93,9.22 15.7,8.99 15.7,8.76 15.54,8.76 v15.32,8.53
  Power 0.152: v32.84,2.9 32.23,2.9 31.01,4.12 22.63,4.12 21.11,5.64 20.19,5.64 19.43,6.4 19.43,7.85 18.75,8.53 v15.32,8.53
GND  (via drill 0.38, 0.76)
  Top 0.152: IC8.1 6.95,5.24 v7.17,5.02 | IC8.4 6.95,3.29 v7.17,3.52 | IC7.4 6.95,17.92 v7.17,18.15 | IC7.1 6.95,19.87 v7.17,19.65
  Top 0.254: IC2.2 v12.72,19.05 | IC3.2 15.85,18.29 v15.77,18.29
  Top 0.305: 23.77,3.58 23.77,3.43 22.96,4.25 IC4.41 22.96,6.73 v23.01,6.78
  Bottom 0.305: 21.67,17.22 C11.2
  other vias: 8.67,19.65 8.67,18.15 7.92,18.9 8.67,5.02 8.67,3.52 7.92,4.27 8.69,8.69 1.07,10.67 33.3,10.06 22.86,15.32 18.52,10.44 15.16,13.94 44.35,18.29 44.81,21.11
  pour Top (rank 6): 0,23.16 51.21,23.16 51.21,4.88 38.86,4.88 38.86,0 0,0
  pour Bottom (rank 6): 0,23.16 55.02,23.16 55.02,4.88 38.86,4.88 38.86,0 0,0
  pour Ground (rank 6): 0,23.16 52.58,23.16 52.58,4.88 38.86,4.88 38.86,0 0,0
  pour Top (no thermals): 42.67,5.26 42.67,7.85 40.61,7.85 40.61,11.89 36.58,11.89 35.74,11.05 35.74,9.14 34.75,9.14 34.75,5.26
  pour Top (no thermals): 37.64,12.04 37.64,13.72 36.88,14.48 36.2,14.48 36.2,15.7 44.35,15.7 44.35,7.85 42.98,7.85 42.98,8.15 40.92,8.15 40.92,9.22 40.69,9.22 40.69,12.04
  pour Top: 37.34,12.04 37.34,13.11 36.73,13.11 36.73,14.17 32.46,14.17 32.46,9.45 35.43,9.45 35.43,11.2 36.27,12.04
  pour Top (no thermals): 4.8,11.43 0,11.43 0,9.83 4.8,9.83
IC3/INT3/RD10  (via drill 0.38)
  Top 0.152: v24.54,6.86 24.46,6.78 IC4.44 | v33.3,21.41 33.38,21.41 34.37,22.4 38.1,22.4 38.63,21.87 38.63,17.45 38.1,16.92 35.36,16.92 33.83,15.39 31.62,15.39 31.24,15.01 31.24,9.22 31.09,9.07 v30.94,9.07
  Bottom 0.152: v24.54,6.86 25.53,7.85 28.96,7.85 29.34,8.23 29.34,8.99 29.72,9.37 30.33,9.37 30.79,8.91 v30.94,9.07 | v33.3,21.41 31.9,21.41 P16.1
IMU_IRQ  (via drill 0.38)
  Top 0.254: IC9.12 28.92,17.68 v27.89,17.68
  Top 0.305: IC4.42 23.46,6.16 23.77,6.48 23.77,7.62 v24.31,8.15
  Ground 0.152: v24.31,8.15 25.91,9.75 25.91,10.97 26.44,11.51 27.28,11.51 27.81,12.04 27.81,15.93 27.89,16 v27.89,17.68
LOWBATT_IRQ
  Top 0.152: IC4.43 23.96,4.46 24.54,3.89 24.54,0.61 24.46,0.53 20.58,0.53 IC1.2
MOTOR_A_BEMF  (via drill 0.38)
  Top 0.305: IC4.21 17.9,12.72 v18.52,13.34
  Ground 0.152: v18.52,13.34 17.07,13.34 v15.32,15.09
  Bottom 0.254: v15.32,15.09 15.01,15.09 14.22,14.3 R29.2
  Bottom 0.305: R29.2 C41.1
MOTOR_A_IN1  (via drill 0.38)
  Top 0.305: IC7.14 8.25,22.15 v8.23,22.17 | IC4.61 29.61,13.22 v30.02,13.64
  Power 0.152: v30.02,13.64 29.57,13.64 27.96,12.04 27.96,11.05 27.2,10.29 26.29,10.29 26.06,10.52 20.65,10.52 20.12,11.05 17.75,11.05 16.69,12.12 14.78,12.12 13.03,13.87 9.45,13.87 9.3,14.02 9.3,21.26 8.91,21.64 8.76,21.64 v8.23,22.17
MOTOR_A_IN2  (via drill 0.38)
  Top 0.305: 8.9,21.09 IC7.13 8.9,21.7 v9.37,22.17 | IC4.60 27.51,12.72 v26.9,13.34
  Power 0.152: v9.37,22.17 9.37,22.02 10.52,20.88 10.52,17.45 10.13,17.07 10.13,15.47 10.52,15.09 13.03,15.09 14.78,13.34 15.93,13.34 17.91,11.35 20.27,11.35 20.8,10.82 25.91,10.82 26.29,11.2 26.29,12.72 v26.9,13.34
MOTOR_A_OUT1  (via drill 0.76)
  Bottom 0.254: v1.07,21.49 1.5,21.06 1.65,21.06
  Bottom 0.305: 1.65,21.06 C24.1 2.77,21.06 3.5,21.79 4.75,21.79 R9.1
  pour Top (no thermals): 0,20.8 7.01,20.8 7.01,21.34 5.18,21.34 5.18,22.17 0,22.17
MOTOR_A_OUT2  (via drill 0.76)
  Bottom 0.254: 1.19,20.09 1.07,19.96 v1.07,19.81
  Bottom 0.305: 1.19,20.09 C24.2 2.95,20.09 3.91,21.06 R10.1
  pour Top (no thermals): 0,20.5 5.18,20.5 5.18,19.58 6.4,19.58 6.4,19.13 0,19.13
MOTOR_B_BEMF  (via drill 0.38)
  Top 0.305: IC4.22 15.67,12.22 v15.16,12.72
  Ground 0.152: v7.54,15.62 8.08,15.09 12.57,15.09 14.94,12.72 v15.16,12.72
  Bottom 0.254: v7.54,15.62 6.68,16.48 R30.2
  Bottom 0.305: C42.1 5.44,16.48 R30.2
MOTOR_B_IN1  (via drill 0.38)
  Top 0.305: v10.82,15.7 8.38,15.7 8.23,15.85 8.23,16.93 IC7.7 | IC4.63 29.39,14.22 v30.02,14.86
  Power 0.152: v10.82,15.7 16.54,15.7 17.6,14.63 17.6,13.18 18.14,12.65 20.34,12.65 20.65,12.34 20.65,11.43 20.95,11.12 25.68,11.12 25.98,11.43 25.98,13.34 26.59,13.95 28.19,13.95 28.88,14.63 29.34,14.63 29.57,14.86 v30.02,14.86
MOTOR_B_IN2  (via drill 0.38)
  Top 0.305: IC7.8 10.56,16.95 v10.74,16.76 | IC4.62 27.58,13.72 26.9,14.4 v26.9,14.55
  Power 0.152: v10.74,16.76 11.28,16.23 16.61,16.23 17.91,14.94 17.91,14.17 18.06,14.02 20.8,14.02 21.03,13.79 21.03,11.51 21.11,11.43 25.53,11.43 25.68,11.58 25.68,13.56 26.67,14.55 v26.9,14.55
MOTOR_B_OUT1  (via drill 0.76)
  Bottom 0.254: v1.07,16.31 1.85,15.52 C25.1 2.74,14.81
  Bottom 0.305: R13.1 2.74,14.81
  pour Top (no thermals): 0,15.62 0,16.99 7.01,16.99 7.01,16.46 5.33,16.46 5.33,15.62
MOTOR_B_OUT2  (via drill 0.76)
  Bottom 0.254: v1.07,17.98 2.56,16.48 C25.2
  Bottom 0.305: R14.1 C25.2
  pour Top (no thermals): 0,18.67 6.4,18.67 6.4,18.29 5.18,18.29 5.18,17.3 0,17.3
MOTOR_C_BEMF  (via drill 0.38)
  Top 0.305: IC4.23 18.28,11.72 v18.52,11.96
  Ground 0.152: v7.16,7.39 5.87,7.39 4.88,8.38 4.88,9.07 5.11,9.3 12.19,9.3 14.71,11.81 18.36,11.81 v18.52,11.96
  Bottom 0.152: v7.16,7.39 6.48,6.71 5.49,6.71 R31.2
  Bottom 0.305: C43.1 4.17,5.36 R31.2
MOTOR_C_IN1  (via drill 0.38)
  Top 0.254: IC4.1 26.44,16.69 26.44,15.47 26.14,15.16 26.14,12.12 25.98,11.96 v19.96,11.96 | IC8.14 8.25,7.03 v8.53,7.32
  Ground 0.152: v8.53,7.32 8.08,7.32 7.39,6.63 6.1,6.63 4.5,8.23 4.5,9.14 4.95,9.6 12.04,9.6 12.04,11.35 12.8,12.12 17.53,12.12 17.98,12.57 19.36,12.57 v19.96,11.96
MOTOR_C_IN2  (via drill 0.38)
  Top 0.305: v9.75,7.01 9.22,7.01 8.91,6.71 8.91,6.23 IC8.13 | 28.42,14.74 IC4.64 28.42,14.72 v28.42,15.62
  Ground 0.152: v9.75,7.01 9.14,7.01 8.46,6.33 5.94,6.33 4.19,8.08 4.19,9.3 4.88,9.98 4.88,14.78 5.18,15.09 6.02,15.09 7.16,16.23 9.3,16.23 10.59,17.53 10.59,20.5 10.9,20.8 11.51,20.8 11.81,20.5 11.81,17.3 v11.58,17.07
  Power 0.152: v11.58,17.07 20.27,17.07 20.27,16.38 20.57,16.08 27.2,16.08 27.51,15.77 28.27,15.77 v28.42,15.62
MOTOR_C_OUT1  (via drill 0.76)
  Bottom 0.254: v1.07,6.86 1.85,7.64 C27.1
  Bottom 0.305: C27.1 2.74,8.36 R19.1
  pour Top (no thermals): 0,7.54 4.88,7.54 4.88,6.71 7.01,6.71 7.01,6.17 0,6.17
MOTOR_C_OUT2  (via drill 0.76)
  Bottom 0.254: v1.07,5.18 2.56,6.68 C27.2
  Bottom 0.305: R20.1 C27.2
  pour Top (no thermals): 6.4,4.5 0,4.5 0,5.87 4.88,5.87 4.88,4.88 6.4,4.88
MOTOR_D_BEMF  (via drill 0.38)
  Top 0.305: IC4.24 15.41,11.22 v15.39,11.2
  Power 0.152: v14.1,5.87 14.71,6.48 14.71,10.36 15.39,11.05 v15.39,11.2
  Bottom 0.152: v14.1,5.87 13.28,6.68 12.72,6.68
  Bottom 0.305: R32.2 12.72,6.68 C44.1
MOTOR_D_IN1  (via drill 0.38)
  Top 0.254: v25.22,18.29 25.46,18.05 IC4.3
  Top 0.305: IC8.7 8.25,1.24 v8,0.99
  Ground 0.152: v8,0.99 8,1.83 9.53,3.35 9.53,5.87 11.05,7.39 12.12,7.39 13.26,8.53 13.26,9.91 13.95,10.59 15.85,10.59 16.61,11.35 20.5,11.35 20.65,11.51 24.92,11.51 25.68,12.27 25.68,17.98 25.53,17.98 v25.22,18.29
MOTOR_D_IN2  (via drill 0.38)
  Top 0.254: v26.21,19.13 25.96,18.87 IC4.2
  Top 0.305: IC8.8 8.9,1.31 v9.22,0.99 | 26.29,19.2 v26.21,19.13
  Ground 0.152: v9.22,0.99 9.91,1.68 9.91,5.79 11.2,7.09 12.27,7.09 14.33,9.14 15.93,9.14 16.61,9.83 18.9,9.83 20.12,11.05 20.65,11.05 20.8,11.2 25.15,11.2 25.98,12.04 25.98,18.44 26.21,18.67 v26.21,19.13
MOTOR_D_OUT1  (via drill 0.76)
  Bottom 0.254: v1.07,1.68 1.5,2.11 C28.1
  Bottom 0.305: R23.1 5.46,2.11 4.72,1.37 3.48,1.37 C28.1
  pour Top (no thermals): 0,2.36 arc-2 6.1,2.36 7.01,2.36 7.01,1.83 4.88,1.83 4.88,0.99 0,0.99
MOTOR_D_OUT2  (via drill 0.76)
  Bottom 0.254: 1.19,3.07 1.07,3.2 v1.07,3.35 | C28.2 3.02,3.07 3.66,2.44 3.79,2.44 R24.1
  Bottom 0.305: 1.19,3.07 C28.2 2.62,3.07 2.59,3.05
  pour Top (no thermals): 0,2.67 0,4.04 6.4,4.04 6.4,3.66 4.88,3.66 4.88,2.67
N$1  (via drill 0.38)
  Top 0.254: v43.66,12.19 43.35,11.88 43.13,11.88 | 43.13,11.88 IC5.14 | IC5.13 42.3,11.35 43.13,11.35 43.13,11.88
  Bottom 0.305: C22.2 42.8,12.19 v43.66,12.19
N$2  (via drill 0.38)
  Top 0.305: IC7.9 9.89,17.91 v11.2,17.91
  Bottom 0.305: C31.2 9.96,17.91 v11.2,17.91
N$3  (via drill 0.38)
  Top 0.152: IC5.29 37.22,10.82 36.58,10.82 36.42,10.67 v36.42,8.08
  Bottom 0.254: 37.92,8.23 37.54,7.85 36.65,7.85 v36.42,8.08
  Bottom 0.305: C20.2 37.92,8.23
N$4
  Top 0.406: ANT1.A arc-45 40.23,3.14 40.23,3.81 39.34,4.7 arc-45 39.23,4.99 B1.1
N$5  (via drill 0.38)
  Top 0.254: v37.87,0.84 LED_TX.C
  Bottom 0.254: v37.87,0.84 37.9,0.86 R6.1
N$6
  Top 0.152: 38.25,6.86 C16.1 arc-90 38.91,7.54 39.01,7.54 arc90 39.53,8.06 IC5.4
N$7
  Top 0.152: 41.3,6.86 C17.2 arc90 40.64,7.54 40.46,7.54 arc-90 40.03,7.98 IC5.5
N$8  (via drill 0.38)
  Top 0.229: OSC2.3 34.19,12.34 35.43,12.34 35.96,12.88 36.12,12.88 | 36.12,12.88 IC5.25 | v36.12,13.49 36.12,12.88
  Bottom 0.305: C19.1 v36.12,13.49
N$9  (via drill 0.38)
  Top 0.152: 34.59,11.51 34.66,11.44 OSC2.1
  Top 0.229: 34.59,11.51 35.36,11.51 36.2,12.34 37.25,12.34 IC5.26 | OSC2.1 34.69,10.06 v34.67,10.06
  Bottom 0.305: C18.1 34.67,11.18 v34.67,10.06
N$10
  Top 0.152: C17.1 arc-90 41.21,5.83 B1.3
N$11  (via drill 0.38)
  Top 0.254: LED_RX.C 32.77,6.11 v32.77,5.33
  Bottom 0.152: v32.77,5.33 R7.1
N$12
  Top 0.152: C16.2 arc-90 38.66,6.33 38.79,6.33 arc90 39.23,6.76 B1.4
N$13  (via drill 0.38)
  Top 0.254: v37.11,8.69 37.17,8.62 IC5.1 | LED_RX.A 33.91,6.34 v33.91,5.33
  Bottom 0.254: v37.11,8.69 36.88,8.91 35.13,8.91 34.59,8.38 34.59,5.79 34.14,5.33 v33.91,5.33
N$14  (via drill 0.38)
  Top 0.254: IC5.10 43.54,9.88 v43.66,9.75 | LED_TX.A 37.87,4.57 v37.95,4.65
  Bottom 0.254: v37.95,4.65 37.95,4.8 38.71,5.56 43.28,5.56 43.66,5.94 v43.66,9.75
N$15  (via drill 0.38)
  Top 0.254: LED1.C 35.74,1.45 v36.65,2.36
  Bottom 0.254: R26.1 v36.65,2.36
N$16  (via drill 0.38)
  Top 0.254: v36.8,4.57 36.8,4.25 LED2.C
  Bottom 0.254: R27.1 36.8,5.36 v36.8,4.57
N$17  (via drill 0.38)
  Top 0.254: LED3.C 34.48,4.27 35.59,4.27 v35.66,4.19
  Bottom 0.254: R28.1 v35.66,4.19
N$18  (via drill 0.38)
  Top 0.305: IC7.12 10.88,19.87 v11.2,20.19
  Bottom 0.305: C32.1 9.93,20.19 v11.2,20.19
N$19  (via drill 0.38)
  Top 0.305: IC8.9 10.65,3.29 v11.2,2.74
  Bottom 0.254: C34.2 11.1,2.85 v11.2,2.74
N$20  (via drill 0.38)
  Top 0.305: IC8.12 11.19,5.24 v11.2,5.26
  Bottom 0.305: C35.1 11.46,5.51 v11.2,5.26
N$21  (via drill 0.38)
  Top 0.305: IC4.19 17.91,13.72 18.52,14.33 v18.52,14.86
  Bottom 0.152: L1.1 21.2,12.5 20.65,12.5 20.5,12.65 18.06,12.65 17.91,12.8 17.91,13.64 18.52,14.25 v18.52,14.86
  Bottom 0.254: v18.52,14.86 17.58,14.86 C10.1 | 21.17,12.21 L1.1
N$22  (via drill 0.38)
  Top 0.152: IC6.6 7.17,13.86 v6.55,14.48
  Bottom 0.305: R13.2 R12.1 5.51,12.5 5.94,12.5 6.55,13.11 v6.55,14.48
N$23  (via drill 0.38)
  Top 0.152: IC6.5 7.67,14.42 v7.62,14.48
  Bottom 0.152: R14.2 4.12,15.85 4.27,16 6.1,16 v7.62,14.48
  Bottom 0.305: R15.2 v7.62,14.48
N$24  (via drill 0.38)
  Top 0.152: IC6.11 7.17,9.31 v6.55,8.69
  Bottom 0.305: R19.2 R17.1 5.51,10.67 6.1,10.67 6.55,10.21 v6.55,8.69
N$25  (via drill 0.38)
  Top 0.152: IC6.12 7.67,8.74 v7.62,8.69
  Bottom 0.152: R20.2 4.12,7.32 4.27,7.16 6.1,7.16 6.1,7.47 6.63,8 6.93,8 v7.62,8.69
  Bottom 0.305: R21.2 v7.62,8.69
N$26  (via drill 0.38)
  Top 0.152: IC6.15 9.18,9.65 9.53,9.3 10.21,9.3 v10.82,8.69
  Bottom 0.152: R23.2 5.49,4.5 6.78,5.79 10.52,5.79 10.82,6.1 v10.82,8.69
  Bottom 0.305: R22.1 10.82,9.42 v10.82,8.69
N$27  (via drill 0.38)
  Top 0.152: IC6.14 8.68,9.61 9.6,8.69 v9.75,8.69
  Bottom 0.152: v9.75,8.69 10.52,7.92 10.52,6.25 10.36,6.1 6.63,6.1 5.18,4.65 5.18,4.14 R24.2
  Bottom 0.305: R25.2 v9.75,8.69
N$28  (via drill 0.38)
  Top 0.305: IC4.56 27.07,10.72 v26.9,10.9
  Bottom 0.305: v26.9,10.9 27.51,10.29 28.18,10.29 28.27,10.2 C15.1
N$29  (via drill 0.38)
  Top 0.254: IC9.20 v34.21,18.3 v34.21,18.29
  Bottom 0.254: C38.2 34.21,18.26 v34.21,18.29
N$30  (via drill 0.38)
  Top 0.152: v10.82,14.48 10.21,13.87 9.55,13.87 9.22,13.54 9.22,13.16 9.19,13.13 IC6.2
  Bottom 0.152: v10.82,14.48 10.06,15.24 10.06,17.07 9.75,17.37 9.37,17.37 9.3,17.45 9.3,19.96 8.99,20.27 6.17,20.27 5.99,20.09 R9.2
  Bottom 0.305: R8.1 10.82,13.74 v10.82,14.48
N$31  (via drill 0.38)
  Top 0.152: v9.91,14.48 9.6,14.48 8.69,13.56 8.69,13.14 IC6.3
  Bottom 0.152: R10.2 4.29,20.09 5.18,19.2 5.18,18.36 6.17,17.37 6.25,17.37 6.33,17.3 8.23,17.3 8.46,17.07 9.6,17.07 9.75,16.92 9.75,15.01 9.91,14.86 v9.91,14.48
  Bottom 0.254: v9.91,14.48 9.75,14.33 R11.2
N$32  (via drill 0.38)
  Top 0.254: IC9.10 29.02,18.82 28.57,18.82 28.5,18.82 v27.89,19.43
  Bottom 0.254: C39.2 28.02,19.3 v27.89,19.43
N$34  (via drill 0.38)
  Top 0.152: v11.89,8.69 10.9,9.68 9.68,9.68 IC6.16
  Bottom 0.305: R22.2 11.15,10.67 11.58,10.67 11.89,10.36 v11.89,8.69 R32.1
N$35  (via drill 0.38)
  Top 0.152: v5.49,8.69 5.66,8.69 6.67,9.7 IC6.10
  Bottom 0.305: R17.2 v5.49,8.69 R31.1
N$36  (via drill 0.38)
  Top 0.152: v11.89,14.48 10.9,13.49 9.68,13.49 IC6.1
  Bottom 0.152: 14.02,15.24 14.17,15.24 R29.1
  Bottom 0.254: v11.89,14.48 13.26,14.48 14.02,15.24
  Bottom 0.305: v11.89,14.48 11.89,12.8 11.58,12.5 11.15,12.5 R8.2
N$37  (via drill 0.38)
  Top 0.152: v5.49,14.48 5.66,14.48 6.67,13.47 IC6.7
  Bottom 0.305: R12.2 v5.49,14.48 R30.1
PGC
  Top 0.254: 16.99,15.62 16.99,16.31 18.59,17.91 19.2,17.91 19.28,17.98 19.28,18.06 19.43,18.21 19.43,18.91 JP1.5
  Top 0.305: IC4.17 16.99,14.74 16.99,15.62
PGD
  Top 0.152: IC4.18 16.94,14.25 16.08,14.25 15.93,14.4 15.93,15.01 16.61,15.7 16.61,16.46 18.52,18.36 18.52,19.58 18.67,19.74 19.81,19.74 19.89,19.66 19.89,18.98 JP1.4 19.96,18.95
RADIO_IRQ  (via drill 0.38)
  Top 0.152: IC4.45 24.96,3.85 v25.3,3.5
  Top 0.254: 38.03,13.87 v36.8,15.09
  Top 0.305: IC5.24 38.03,13.87
  Bottom 0.152: v25.3,3.5 25.3,4.42 27.96,7.09 29.11,7.09 29.41,7.39 29.41,7.77 29.79,8.15 31.7,8.15 32.23,8.69 32.23,11.51 33.83,13.11 34.82,13.11 v36.8,15.09
RADIO_SLP_TR  (via drill 0.38)
  Top 0.254: IC5.11 43.06,10.38 v43.66,10.97
  Top 0.305: IC4.30 16.07,8.22 15.39,7.54 v15.39,7.09
  Ground 0.152: v15.39,7.09 15.39,3.2 17.22,1.37 28.8,1.37 30.02,2.59 30.02,3.81 33.38,7.16 37.11,7.16 40.92,10.97 v43.66,10.97
RD_LED  (via drill 0.38)
  Top 0.254: v31.7,4.34 LED3.A
  Top 0.305: v18.52,9.22 18.01,9.72 IC4.27
  Power 0.152: v18.52,9.22 20.73,7.01 20.73,6.55 22.78,4.5 31.55,4.5 v31.7,4.34
SCK1  (via drill 0.38)
  Top 0.254: IC5.19 40.53,14.16 41.45,15.09 v41.68,15.09
  Top 0.305: v19.66,3.5 19.96,3.8 IC4.35
  Ground 0.152: v19.66,3.5 20.27,4.12 29.34,4.12 34.06,8.84 35.74,8.84 41.68,14.78 v41.68,15.09
SCK2  (via drill 0.38)
  Top 0.152: IC4.4 24.99,16.67 24.99,15.77 25.3,15.47 25.3,15.01 24.99,14.71 v24.99,14.33
  Top 0.254: v31.93,18.67 32.08,18.82 32.08,19.43 32.45,19.8 IC9.23
  Top 0.305: IC9.23 34.13,19.8 34.44,20.12 35.4,20.12 IC10.2
  Bottom 0.152: v24.99,14.33 25.98,15.32 27.58,15.32 27.96,14.94 28.96,14.94 29.57,15.54 30.71,15.54 31.93,16.76 v31.93,18.67
SCL1  (via drill 0.38)
  Top 0.152: JP4.20 46.35,17.77 47.02,18.44 v48.39,18.44
  Top 0.305: v20.04,6.78 20.46,6.37 IC4.36
  Ground 0.152: v20.04,6.78 18.59,6.78 17.3,5.49 17.3,3.89 18.44,2.74 21.79,2.74 21.95,2.59 27.74,2.59 27.96,2.36 28.8,2.36 v29.41,2.97 29.41,3.66 33.22,7.47 36.96,7.47 42.29,12.8 46.79,12.8 46.94,12.95 47.55,12.95 47.78,12.72 47.78,12.65 48.08,12.34 48.69,12.34 49.15,12.8 49.15,17.68 v48.39,18.44
  Bottom 0.152: JP3.3 29.28,3.1 v29.41,2.97
  Bottom 0.406: R4.1 v20.04,6.78
SDA1  (via drill 0.38)
  Top 0.152: v48.39,19.81 47.02,19.81 45.97,18.77 JP4.22 45.06,18.77 45.03,18.75 44.81,18.75 44.04,19.51 41.45,19.51 41.15,19.2 41.15,17.22 40.54,16.61 35.59,16.61 34.06,15.09 31.77,15.09 31.55,14.86 31.55,8 30.02,6.48 v29.34,6.48
  Top 0.305: v21.03,3.5 20.96,3.58 IC4.37
  Ground 0.152: v21.03,3.5 24,3.5 24.61,2.9 28.04,2.9 v28.19,3.05
  Power 0.152: 48.46,19.81 v48.39,19.81
  Bottom 0.152: v28.19,3.05 28.19,4.15 JP3.5 28.19,4.33 28.19,4.95
  Bottom 0.254: 28.19,4.95 29.34,6.1 v29.34,6.48
  Bottom 0.406: R5.1 21.03,3.37 v21.03,3.5
SDI1  (via drill 0.38)
  Top 0.254: IC5.20 40.03,14.65 v40.46,15.09
  Top 0.305: v18.67,3.5 19.46,4.29 IC4.34
  Ground 0.152: v40.46,15.09 40.46,14.1 35.51,9.14 33.91,9.14 29.18,4.42 19.2,4.42 18.67,3.89 v18.67,3.5
SDI2  (via drill 0.38)
  Top 0.152: IC4.5 24.46,15.85 24.61,15.7 v24.61,15.24 | IC9.9 29.09,19.36 v30.63,19.36 | v41.91,21.26 42.06,21.41 IC10.8
  Top 0.305: IC10.8 43.2,21.41
  Ground 0.152: v41.91,21.26 40.01,19.36 v30.63,19.36
  Bottom 0.152: v24.61,15.24 26.29,16.92 26.29,18.29 26.9,18.9 27.43,18.9 27.51,18.82 30.1,18.82 v30.63,19.36
SDO1  (via drill 0.38)
  Top 0.254: IC5.22 39.03,14.87 v39.24,15.09
  Top 0.305: v18.06,5.26 18.08,5.24 IC4.33
  Ground 0.152: v18.06,5.26 18.59,4.72 29.03,4.72 33.76,9.45 35.36,9.45 39.24,13.34 v39.24,15.09
SDO2  (via drill 0.38)
  Top 0.152: IC4.6 24,16.66 v24,14.02 | v37.64,17.6 37.72,17.68 37.72,20.88 37.19,21.41 IC10.1
  Top 0.305: IC9.24 33.56,20.3 34.67,21.41 IC10.1
  Bottom 0.152: v24,14.02 24.31,13.72 25.45,13.72 25.68,13.95 28.19,13.95 28.5,14.25 30.48,14.25 30.86,14.63 30.86,15.24 32.08,16.46 35.43,16.46 36.65,17.68 37.57,17.68 v37.64,17.6
U2RX
  Top 0.152: JP2.6 16.18,4.91 18.06,6.78 18.06,7.47 17.75,7.77 17.68,7.7 16.99,7.7 IC4.31
U2TX
  Top 0.152: 15.16,4.34 JP2.4
  Top 0.254: IC4.32 15.16,5.42 15.16,4.34
V_BATT  (via drill 0.38, 0.76)
  Top 0.254: P1.1 v1.07,12.5 | IC2.1 12.22,19.69 11.96,19.43 11.96,18.75 12.42,18.29 13.18,18.29 13.49,18.59 13.49,19.36 | 13.49,19.36 13.22,19.62 IC2.3 13.35,20.13 13.56,20.34 13.56,21.57 13.22,21.9 IC2.4 | 13.49,19.36 14.02,19.36 14.25,19.13 v14.25,19.05 | IC3.1 15.35,18.93 15.01,18.59 15.01,17.91 15.32,17.6 16.23,17.6 16.46,17.83 16.46,19.18 | 16.46,19.18 IC3.3 | 16.84,19.29 17.21,19.29 17.21,19.22 v17.45,18.97 | IC3.4 16.35,21.07 16.76,20.65 16.76,19.36 16.83,19.29 16.84,19.29 | JP2.2 JP2.1 13.69,3.23 v13.87,3.05 | IC1.3 17.89,2.38 v17.68,2.59 | IC8.10 10.95,3.94 v10.97,3.96 | 16.46,19.18 16.73,19.18 16.84,19.29 | v9.3,7.85 9.14,8 8.15,8 7.85,7.7 7.85,7.16 7.77,7.09 7.77,7.01 7.6,6.84 IC8.15
  Top 0.305: IC7.10 9.89,18.59 10.74,18.59 v11.2,19.05 | 7.6,21.05 IC7.15 7.6,21.66 v7.09,22.17
  Bottom 0.254: v14.25,19.05 14.25,18.27 C4.2 | R1.2 19.74,18.14 18.9,18.97 v17.45,18.97 16.92,18.44 C5.2 16.92,18.36 | v17.68,2.59 18.21,2.06 C3.1 | v10.97,3.96 11.37,3.57 C33.1 | v11.2,19.05 12.65,17.6 C30.1 | v11.05,1.22 10.39,1.88 C34.1
  Bottom 0.305: C31.1 11.07,18.92 v11.2,19.05
  pour Power: 18.97,23.24 0,23.16 0,0 18.9,0.08 18.9,8.15 8.08,8.08 8.08,15.09 20.8,15.09 20.73,16.92 18.97,16.92
  pour Top (no thermals): 4.72,13.26 0,13.26 0,11.73 4.72,11.73
V_REF
  Bottom 0.305: R21.1 R15.1 R11.1 9.75,11.58 | R25.1 9.75,11.58 | C26.1 R18.2 12.65,11.58 | 12.65,11.58 R16.1 | 12.65,11.58 9.75,11.58
YW_LED  (via drill 0.38)
  Top 0.254: LED1.A v32.77,1.45 | 18.02,8.72 18.21,8.53 18.21,8.15 v18.59,7.77
  Top 0.305: IC4.29 18.02,8.72
  Power 0.152: v32.77,1.45 31.93,2.29 28.04,2.29 27.51,2.82 23.47,2.82 20.95,5.33 20.04,5.33 18.9,6.48 18.9,7.47 v18.59,7.77

## Text on the board
tNames: U2 | U1